# Altium PCB KNX-GW_1_3.PcbDoc
Units mm, origin at the board's own origin, x right, y up, seen from the top; angles counter-clockwise.
Board outline 29.21 x 81.99 mm, 4 copper layers (Top Layer, 3V3, GND, Bottom Layer), stack 0.778 mm thick; 65 components, 55 nets, 262 pads, 89 vias.
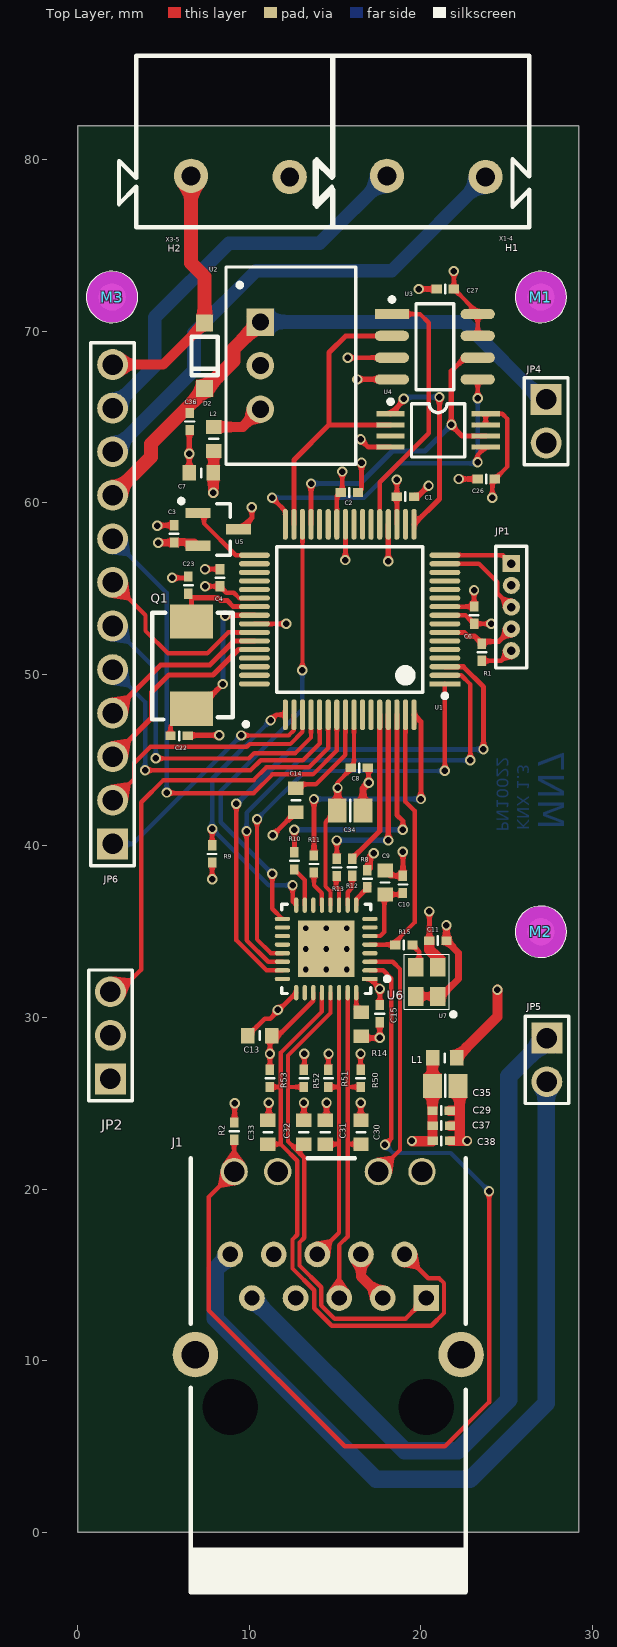
[diagram p0: Top Layer view]
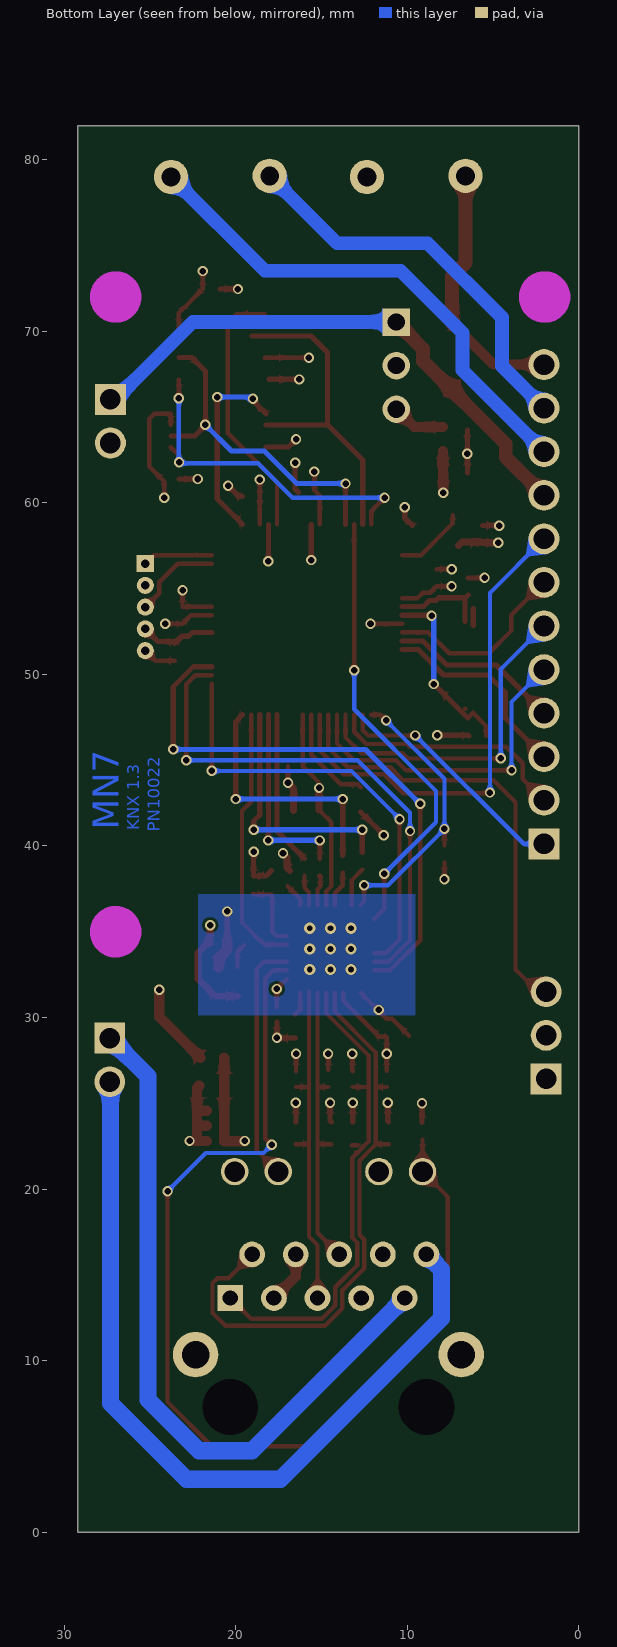
[diagram p1: Bottom Layer view, seen from below]
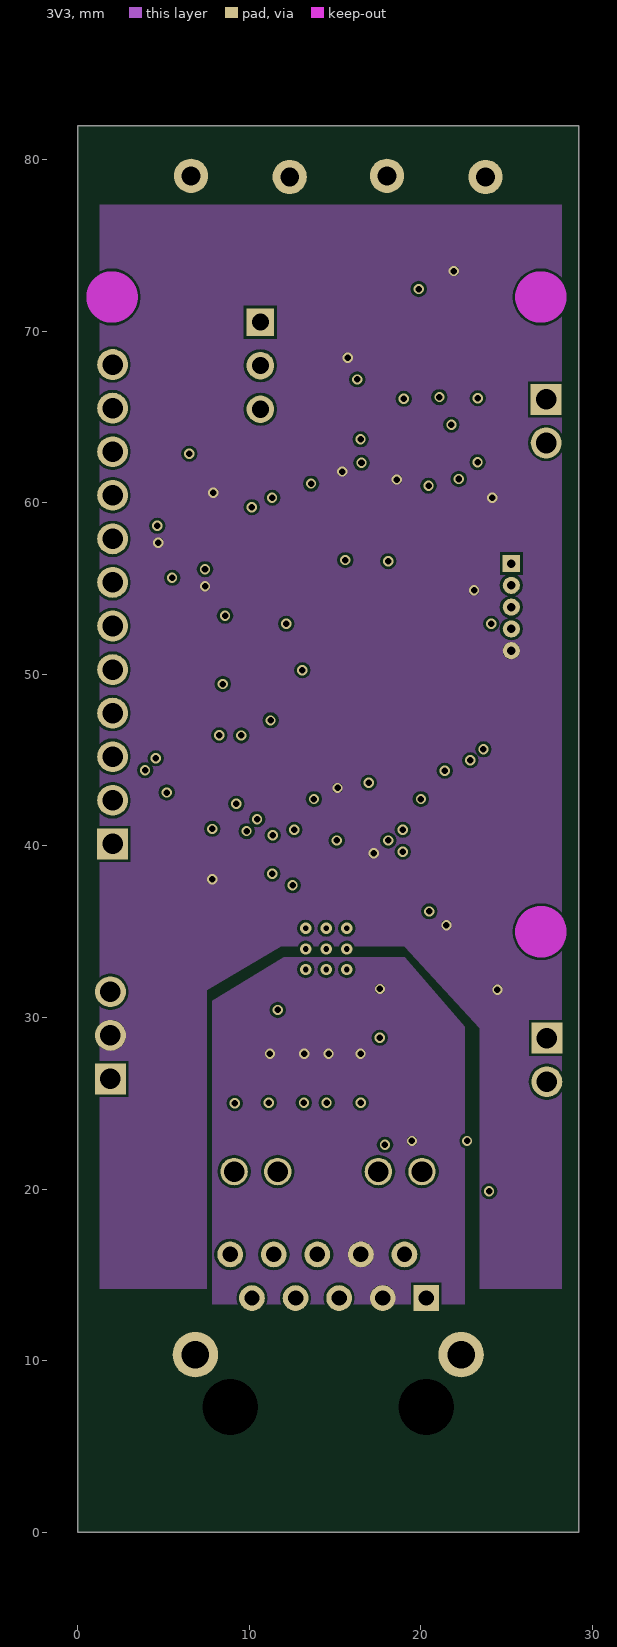
[diagram p2: 3V3]
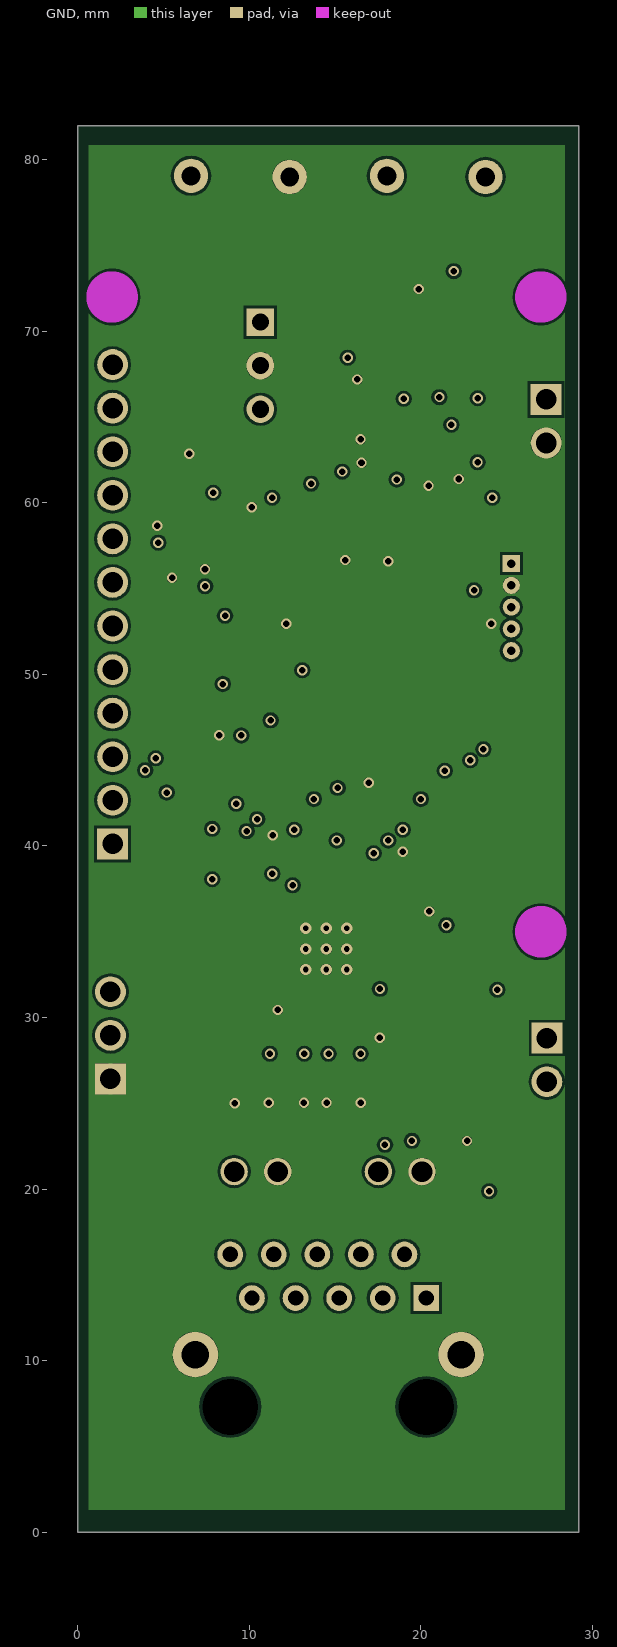
[diagram p3: GND]

## Layer stack, top to bottom
Top Solder: solder mask 0.0102, Solder Resist, Dk 3.5
Top Layer: signal copper 0.0356
Dielectric 1: core 0.254, FR-4, Dk 4.2
3V3: signal copper 0.036
Dielectric 3: prepreg 0.127, Dk 4.2
GND: signal copper 0.036
Dielectric 2: core 0.254, Dk 4.2
Bottom Layer: signal copper 0.0356
Bottom Solder: solder mask 0.0102, Solder Resist, Dk 3.5

## Board outline
0,0 0,81.991 29.21,81.991 29.21,0

## Design rules (kind name [scope] priority, off if disabled: settings)
Clearance AT90 [IsPad vs IsPad] p1: gap=0.1
Clearance [All] p2: gap=0.16
ComponentClearance Board1 [((id='Multi_HITSCHIENE_POE')  OR (id='Multi_HUTSCHIENE_EXT_1_1'))] p1: gap=0 collisioncheckmode=3 verticalgap=0 showdistances=FALSE
ComponentClearance Case [id='00010333'] p2: gap=0 collisioncheckmode=3 verticalgap=0 showdistances=FALSE
ComponentClearance ComponentClearance_1 [(HasFootprint('WAGO-243-211') AND HasFootprint('WAGO-243-211'))] p3: gap=0 collisioncheckmode=3 verticalgap=0 showdistances=FALSE
ComponentClearance [All] p4: gap=0.254 collisioncheckmode=3 verticalgap=0.254 showdistances=FALSE
DiffPairsRouting [All] p1: maxlimit=0.254 minlimit=0.12 mostfreqgap=0.16 toplayer_minwidth=0.2 toplayer_maxwidth=0.381 toplayer_prefwidth=0.381 midlayer1_minwidth=0.2 midlayer1_maxwidth=0.381 midlayer1_prefwidth=0.381 midlayer2_minwidth=0.2 midlayer2_maxwidth=0.381 midlayer2_prefwidth=0.381 bottomlayer_minwidth=0.2 bottomlayer_maxwidth=0.381 bottomlayer_prefwidth=0.381 maxuncoupledlength=12.7
HoleSize [All] p1: absolutevalues=TRUE maxlimit=4 minlimit=0.025 maxpercent=80.000 minpercent=20.000
MinimumAnnularRing [HasFootprint('32M1-A_M')] p1: minimumring=0.12
MinimumSolderMaskSliver MinimumSolderMaskSliver_2 [HasFootprint('HDR1X5-1.27')] p1: minsoldermaskwidth=0.05
MinimumSolderMaskSliver MinimumSolderMaskSliver_1 [HasFootprint('32M1-A_M')] p2: minsoldermaskwidth=0
MinimumSolderMaskSliver [All] p3: minsoldermaskwidth=0.1
PolygonConnect [All vs (InNet('GND') AND InPadClass('All Pads'))] p1: connectstyle=Relief reliefconductorwidth=0.254 reliefentries=4 polygonreliefangle="90 Angle" airgapwidth=0
RoomDefinition Ethernet [InComponentClass('Ethernet')] p1: confinementstyle=ConfineIn formatcopy=TRUE lockcomponents=FALSE outline -1.6,-9.804 48.336,-9.804 48.336,87.249 -1.6,87.249
RoomDefinition MCU [InComponentClass('MCU')] p2: confinementstyle=ConfineIn formatcopy=TRUE lockcomponents=FALSE outline -0.965,-9.601 50.838,-9.601 50.838,86.36 -0.965,86.36
RoutingVias [All] p1: holewidth=0.381 width=0.584 viastyle="Through Hole" minholewidth=0.3 minwidth=0.3 maxholewidth=0.711 maxwidth=1.27
ShortCircuit ShortCircuit_1 [U6 vs IsVia] p1: allowed=TRUE
ShortCircuit [All] p2: allowed=FALSE
SilkToBoardRegionClearance [(HasFootprint('7499210121A') AND IsEmbeddedBoard)] p1:
SilkToSilkClearance [All] p1: silktosilkclearance=0.13
SilkToSolderMaskClearance [IsPad] p1: minsilkscreentomaskgap=0.13 clearancetoexposedcopper=TRUE
SolderMaskExpansion [All] p1: expansion=0.102
Width [All] p1: maxlimit=2 minlimit=0.254 preferedwidth=0.254
22 further rules are at their usual default settings.

## Classes and differential pairs
component class Ethernet: C9 C10 C11 C13 C15 C29 C30 C31 C32 C33 C34 C35 C37 C38 J1 JP4 JP5 L1 R2 R8 R9 R10 R11 R12 R13 R14 R15 R50 R51 R52 R53 U6 U7
component class MCU: C1 C2 C3 C4 C6 C7 C8 C14 C22 C23 C26 C27 C36 D2 H1 H2 JP1 JP2 JP6 L2 M1 M2 M3 Q1 R1 U1 U2 U3 U4 U5 X1-4 X3-5
differential pair RX: +RX_P -RX_N
differential pair TX: +TX_P -TX_N

## Components (designator, comment, footprint, x,y, rotation, side; value= is the part's Value field where it differs from the comment)
C1 "100nF16V_0402" C0402 19.101,60.363 r0 top
C2 "100nF16V_0402" C0402 15.837,60.604 r0 top
C3 "100nF16V_0402" C0402 5.613,58.191 r90 top
C4 "100nF16V_0402" C0402 8.293,55.639 r90 top
C6 "100nF16V_0402" C0402 23.101,53.454 r270 top
C7 "10uF10V_0603" C0603 7.201,61.747 r180 top
C8 "100nF25V_0402" C0402 16.408,44.552 r0 top
C9 "1uF50V_0603" C0603 17.92,37.871 r90 top
C10 "470pF50V_0402" C0402 18.948,37.757 r90 top
C11 "100nF16V_0402" C0402 20.993,34.48 r180 top
C13 "22nF50V_0603" C0603 10.604,28.943 r180 top
C14 "10uF10V_0603" C0603 12.713,42.672 r270 top
C15 "100nF25V_0402" C0402 17.602,30.226 r270 top
C22 "22pF50V_0402-AVX" C0402 5.905,46.419 r0 top
C23 "22pF50V_0402-AVX" C0402 6.452,55.207 r90 top
C26 "100nF16V_0402" C0402 23.812,61.392 r180 top
C27 "100nF16V_0402" C0402 21.425,72.466 r180 top
C29 "100nF25V_0402" C0402 21.179,24.575 r0 top
C30 "10pF50V_0603" C0603 16.51,23.32 r90 top
C31 "10pF50V_0603" C0603 14.427,23.32 r90 top
C32 "10pF50V_0603" C0603 13.17,23.32 r90 top
C33 "10pF50V_0603" C0603 11.087,23.32 r90 top
C34 "4u7F25V_0805" C0805 15.875,42.075 r0 top
C35 "4u7F25V_0805" C0805 21.425,26.022 r0 top
C36 "100n50V_0402" C0402 6.528,64.745 r270 top
C37 "100nF25V_0402" C0402 21.196,23.698 r0 top
C38 "100nF25V_0402" C0402 21.196,22.809 r0 top
D2 "RB160M-30TR" SOD123 7.391,68.58 r270 top
H1 "Wago-243-211" WAGO-243-211 20.896,79 r0 top
H2 "Wago-243-211" WAGO-243-211 9.479,79 r0 top
J1 "7499210124A" 7499210124A 14.6,7.3 r180 top
JP1 "ICDI" HDR1X5-1.27 25.273,53.924 r270 top
JP2 "Header-3" HDR1X3 1.905,28.963 r90 top locked
JP4 "Header-2" HDR1X2 27.305,64.762 r270 top
JP5 "Header-2" HDR1X2 27.343,27.528 r270 top locked
JP6 "Plug_12_2.54" HDR1X12_2.54 2.032,54.094 r90 top locked
L1 "120R4A_0603" L0603 21.387,27.648 r0 top
L2 "300R2A_0603" L0603 7.925,63.729 r270 top
M1 "Paste-Mark" Mark-3mm 27,72 r0 top
M2 "Paste-Mark" Mark-3mm 27,35 r0 top
M3 "Paste-Mark" Mark-3mm 2,72 r0 top
Q1 "7A-8.000MAAJ-T" TXC_7A 6.629,50.546 r90 top locked
R1 "10k_0402" R0402 23.558,51.295 r270 top
R2 "10k_0402" R0402 9.119,23.381 r270 top
R8 "10k_0402" R0402 16.878,38.087 r90 top
R9 "1k5_0402" R0402 7.836,39.535 r270 top
R10 "10R_0402" R0402 12.624,39.129 r90 top
R11 "10R_0402" R0402 13.767,38.951 r90 top
R12 "10R_0402" R0402 15.989,38.76 r270 top
R13 "10R_0402" R0402 15.1,38.748 r90 top
R14 "12k1_0603" R0603(1608) 16.523,29.616 r90 top
R15 "33R_0402" R0402 19.012,34.227 r180 top
R50 "49R9_0402" R0402 16.485,26.45 r90 top
R51 "49R9_0402" R0402 14.605,26.45 r90 top
R52 "49R9_0402" R0402 13.183,26.45 r90 top
R53 "49R9_0402" R0402 11.201,26.45 r90 top
U1 "PIC32MX695F512H-80I/PT" TQFP-64_N1 15.85,53.2 r180 top locked
U2 "R-783.3-0.5" R-783_3-0_5 10.643,68 r270 top
U3 "25LC1024-I_SM" SOP8_N 20.815,69.101 r0 top
U4 "23LC1024-I_ST" TSSOP8 21.006,64.224 r270 top
U5 "11AA02E48T-I_TT" SOT23_M 8.191,58.458 r0 top locked
U6 "LAN8741-EN" 32M1-A_M 14.482,34 r180 top locked
U7 "SG - 211 S*E -50.000M" "SG - 211 S*E" 20.345,32.08 r90 top
X1-4 "Wago-243-131" WAGO-243-131 20.896,79 r0 top
X3-5 "Wago-243-131" WAGO-243-131 9.479,79 r0 top

## Footprints (in the part's own frame and the unit in brackets; to place one, negate y for a bottom-side part, rotate by r counter-clockwise, add the part's x,y. Pads: shape width x height; smd on the part's side, far side on the other; paste and mask are expansions set on the pad)
32M1-A_M [mm] "QFN, 32-Leads, Body 5x5mm, Pitch 0.5mm, IPC Low Density"
  rect 0.9x0.25 smd: 1(-2.55,1.75)
  oval 0.9x0.25 smd: 2(-2.55,1.25) 3(-2.55,0.75) 4(-2.55,0.25) 5(-2.55,-0.25) 6(-2.55,-0.75) 7(-2.55,-1.25) 8(-2.55,-1.75) 17(2.55,-1.75) 18(2.55,-1.25) 19(2.55,-0.75) 20(2.55,-0.25) 21(2.55,0.25) 22(2.55,0.75) 23(2.55,1.25) 24(2.55,1.75)
  oval 0.25x0.9 smd: 9(-1.75,-2.55) 10(-1.25,-2.55) 11(-0.75,-2.55) 12(-0.25,-2.55) 13(0.25,-2.55) 14(0.75,-2.55) 15(1.25,-2.55) 16(1.75,-2.55) 25(1.75,2.55) 26(1.25,2.55) 27(0.75,2.55) 28(0.25,2.55) 29(-0.25,2.55) 30(-0.75,2.55) 31(-1.25,2.55) 32(-1.75,2.55)
  rect 3.3x3.3 smd: 33(0,0)
  silkscreen extent -3.68,-2.6 2.6,2.6, body extent -2.58,-2.58 2.58,2.58, height 1
7499210124A [mm] "Connector; PCB Jack, Thru-Hole; RJ45,POE; Shielded with Lightpipes; Right Angle"
  rect 1.5x1.5 hole 0.9: 1(-5.715,-6.35)
  round 1.5 hole 0.9: 2(-4.445,-8.89) 3(-3.175,-6.35) 4(-1.905,-8.89) 5(-0.635,-6.35) 6(0.635,-8.89) 7(1.905,-6.35) 8(3.175,-8.89) 9(4.445,-6.35) 10(5.715,-8.89)
  round 1.6 hole 1.2: 11(-5.465,-13.72) 12(-2.925,-13.72) 13(2.946,-13.72) 14(5.486,-13.72)
  round 2.65 hole 1.6: MH1(-7.745,-3.05) MH2(7.745,-3.05)
  round 2.95 hole 3.25 unplated: MH3(-5.715,0) MH4(5.715,0)
  silkscreen extent -8.02,-14.5 8.02,10.8, body extent -8.27,-14.51 8.13,10.79, height 13.81
C0402 [mm] "Chip Capacitor, Body 1.0x0.5mm, IPC High Density"
  rect 0.6x0.5 smd: 1(-0.5,0) 2(0.5,0)
  silkscreen extent 0,-0.25 0,0.25, body extent -0.5,-0.25 0.5,0.25, height 0.5
C0603 [mm] "Chip Capacitor, 0603"
  rect 0.8x0.9 smd: 1(-0.7,0) 2(0.7,0)
  silkscreen extent 0,-0.25 0,0.25, body extent -0.8,-0.4 0.8,0.4, height 0.8
C0805 [mm] "Chip Capacitor, Body 2.0x1.3mm, IPC High Density"
  rect 1.1x1.4 smd: 1(-0.75,0) 2(0.75,0)
  silkscreen extent 0,-0.64 0,0.64, body extent -0.5,-0.25 0.5,0.25, height 0.5
HDR1X2 [mm] "Connector; Header; 2 Position"
  rect 1.8x1.8 hole 1.2: 1(-1.27,0)
  round 1.8 hole 1.2: 2(1.27,0)
  silkscreen extent -2.54,-1.27 2.54,1.27, body extent -2.54,-1.27 2.54,1.27, height 8.62
HDR1X3 [mm] "Connector; Header; 3 Position"
  rect 1.8x1.8 hole 1.2: 1(-2.54,0)
  round 1.8 hole 1.2: 2(0,0) 3(2.54,0)
  silkscreen extent -3.81,-1.27 3.81,1.27, body extent -3.81,-1.27 3.81,1.27, height 8.62
HDR1X5-1.27 [mm] "Connector; Header; 5 Position"
  rect 1x1 hole 0.5: 1(-2.54,0)
  round 1 hole 0.5: 2(-1.27,0) 3(0,0) 4(1.27,0) 5(2.54,0)
  silkscreen extent -3.55,-0.9 3.55,0.9, body extent -3.56,-0.89 3.56,0.89, height 7
HDR1X12_2.54 [mm] "Connector; Header; 11 Position"
  rect 1.8x1.8 hole 1.2: 1(-13.97,0)
  round 1.8 hole 1.2: 2(-11.43,0) 3(-8.89,0) 4(-6.35,0) 5(-3.81,0) 6(-1.27,0) 7(1.27,0) 8(3.81,0) 9(6.35,0) 10(8.89,0) 11(11.43,0) 12(13.97,0)
  silkscreen extent -15.24,-1.27 15.24,1.27, body extent -15.21,-1.27 15.27,1.27, height 8.62
L0603 [mm] "Chip Ferrit, 0603"
  rect 0.8x0.9 smd: 1(-0.7,0) 2(0.7,0)
  silkscreen extent 0,-0.25 0,0.25, body extent -0.8,-0.4 0.8,0.4, height 0.8
Mark-3mm [mm]
  round 1.6 smd paste-2: 0(0,0)
  Keep-Out Layer circle w2: c0,0 r0.5
  silkscreen extent -1.5,-1.5 1.5,1.5
R0402 [mm] "Chip Resistor, Body 1.0x0.5mm"
  rect 0.6x0.5 smd: 1(-0.5,0) 2(0.5,0)
  silkscreen extent 0,-0.25 0,0.25, body extent -0.5,-0.24 0.5,0.26, height 0.4
R0603(1608) [mm] "Chip Resistor, 0603"
  rect 0.8x0.9 smd: 1(-0.7,0) 2(0.7,0)
  body extent -0.8,-0.4 0.8,0.4, height 0.5
R-783_3-0_5 [mm] "Recon DC-DC"
  rect 1.6x1.6 hole 1: 1(-2.54,0)
  round 1.6 hole 1: 2(0,0) 3(2.54,0)
  silkscreen extent -5.75,-2 5.75,5.55, body extent -5.72,-2.03 5.72,5.59, height 10.2
"SG - 211 S*E" [mm]
  rect 1.1x0.9 smd: 1(-0.85,-0.65) 2(0.85,-0.65) 3(0.85,0.65) 4(-0.85,0.65)
  silkscreen extent -2.02,-1.68 1.6,1.3, body extent -1.25,-1 1.25,1, height 1.3
SOD123 [mm]
  rect 1x1 smd: 1(1.905,0) 2(-1.905,0)
  silkscreen extent -1.1,-0.76 1.14,0.76, body extent -1.4,-0.85 1.4,0.88, height 1.4
SOP8_N [mm] "SOIC, 8-Leads, Body 4.9x3.9mm, Pitch 1.27mm, IPC Medium Density"
  rect 2x0.6 smd: 1(-2.5,1.905)
  oval 2x0.6 smd: 2(-2.5,0.635) 3(-2.5,-0.635) 4(-2.5,-1.905) 5(2.5,-1.905) 6(2.5,-0.635) 7(2.5,0.635) 8(2.5,1.905)
  silkscreen extent -2.62,-2.5 1.1,2.88, body extent -3,-2.54 3,2.54, height 1.7
SOT23_M [mm] "SOT23, 3-Leads, Body 2.9x1.3mm, Pitch 0.95mm, Lead Span 2.3mm - Reverse Pinning, IPC Low Density"
  rect 1.45x0.6 smd: 1(1.175,0) 2(-1.175,-0.95) 3(-1.175,0.95)
  silkscreen extent -2.28,-1.5 0.7,1.78, body extent -1.15,-1.5 1.15,1.5, height 1.1
TQFP-64_N1 [mm] "64-Pin Thin Plastic Quad Flat Pack 0.5 mm Pitch, 1.0/0.1 mm Lead Form, IPC Medium Density"
  rect 1.8x0.3 smd: 1(-5.55,3.75)
  oval 1.8x0.3 smd: 2(-5.55,3.25) 3(-5.55,2.75) 4(-5.55,2.25) 5(-5.55,1.75) 6(-5.55,1.25) 7(-5.55,0.75) 8(-5.55,0.25) 9(-5.55,-0.25) 10(-5.55,-0.75) 11(-5.55,-1.25) 12(-5.55,-1.75) 13(-5.55,-2.25) 14(-5.55,-2.75) 15(-5.55,-3.25) 16(-5.55,-3.75) 33(5.55,-3.75) 34(5.55,-3.25) 35(5.55,-2.75) 36(5.55,-2.25) 37(5.55,-1.75) 38(5.55,-1.25) 39(5.55,-0.75) 40(5.55,-0.25) 41(5.55,0.25) 42(5.55,0.75) 43(5.55,1.25) 44(5.55,1.75) 45(5.55,2.25) 46(5.55,2.75) 47(5.55,3.25) 48(5.55,3.75)
  oval 0.3x1.8 smd: 17(-3.75,-5.55) 18(-3.25,-5.55) 19(-2.75,-5.55) 20(-2.25,-5.55) 21(-1.75,-5.55) 22(-1.25,-5.55) 23(-0.75,-5.55) 24(-0.25,-5.55) 25(0.25,-5.55) 26(0.75,-5.55) 27(1.25,-5.55) 28(1.75,-5.55) 29(2.25,-5.55) 30(2.75,-5.55) 31(3.25,-5.55) 32(3.75,-5.55) 49(3.75,5.55) 50(3.25,5.55) 51(2.75,5.55) 52(2.25,5.55) 53(1.75,5.55) 54(1.25,5.55) 55(0.75,5.55) 56(0.25,5.55) 57(-0.25,5.55) 58(-0.75,5.55) 59(-1.25,5.55) 60(-1.75,5.55) 61(-2.25,5.55) 62(-2.75,5.55) 63(-3.25,5.55) 64(-3.75,5.55)
  silkscreen extent -5.68,-4.25 4.25,4.57, body extent -5,-5 5,5, height 1.2
TSSOP8 [mm] "Shrink Small Outline, Plastic, Thin; 8 Leads; Body Width 4.4 mm; Pitch 0.65 mm"
  rect 0.3x1.65 smd: 1(-0.975,-2.775) 2(-0.325,-2.775) 3(0.325,-2.775) 4(0.975,-2.775) 5(0.975,2.775) 6(0.325,2.775) 7(-0.325,2.775) 8(-0.975,2.775)
  silkscreen extent -1.8,-2.9 1.55,1.55, body extent -1.52,-1.52 1.52,1.52, height 1
TXC_7A [mm]
  rect 2x2.5 smd: 1(-2.54,0) 2(2.54,0)
  silkscreen extent -3.57,-3.3 3.05,2.29, body extent -3.17,-2.41 3.05,2.25, height 1.3
WAGO-243-131 [mm]
  round 2 hole 1.1: 1(-2.875,0.064) 2(2.875,0)
  silkscreen extent -7.07,-2.94 5.43,7.06, body extent -3.87,-1 3.87,1.06, height 9
WAGO-243-211 [mm]
  silkscreen extent -7.07,-2.94 5.43,7.06, body extent -7.15,-3 5.45,7, height 10

## Part data
C1 C2 C3 C4 C6 C11 C14 C26 C27: "Capacitor"
C7: "AVX ,  X5R, 20%, 10V"
C8 C15 C29 C37 C38: "AVX, X5R, 10%, 25V"
C9: "C series, X5R, 10%"
C10 C22 C23: "AVX, 50V"
C13: "AVX ,  X7R, 5%, 50V"
C30 C31 C32 C33: "AVX ,  +-0.5pF, 50V"
C34 C35: "TDK  C series, X7R, 10%, 25V"
C36: "C series, X5R, 10%, 50V"
D2: "Diode Schottky,2A,40V"
J1: library part "Ethernet, POE, WE7499210124A", "Modular Jack , Right Angle RJ-45, Low Profile"
JP1 JP4 JP5: "Header, 5-Pin"
JP2: "Header-3-Pin"
JP6: "Plug, 11-Pin"
L1: "Murata, Ferrit, 120Rx2A"
L2: "WE, Ferrit, 300Rx2A"
M1 M2 M3: library part Mark
Q1: library part Crystal_8MHz, "Crystal, 7A-8.000MAAJ-T"
R1 R2 R8 R9 R10 R11 R12 R13: "Vishay CRCW series, 125mW, 1%"
R14: "Vishay, CRCW series, 100mW, 1%"
R15 R50 R51 R52 R53: "Vishay CRCW series, 63mW, 1%"
U1: "High Performance ROM-less Microcontroller with External Memory Bus, 1.5K RAM, 64-Pin TQFP, 4.2 to 5.5V Supply Range, Industrial Temperature"
U2: library part Recom-R-783_3-0_5, "Voltage Regulator"
U3: "1024 Kbit Serial SPI Bus EEPROM"
U4: "1 Mbit Serial  EEPROM"
U5: "2 kbit Serial  EEPROM"
U6: "Ethernet Phy"
U7: "Crystal"

## Via types
v1: diameter 0.6, hole 0.381, Top Layer to Bottom Layer, 80 vias
v2: diameter 0.66, hole 0.33, Top Layer to Bottom Layer, tented top, 9 vias

## Nets (pads, with @x,y where several pads share a name; then routed paths per layer and width w, separated by ;. In a path a pad name is that pad's centre, name@x,y a point inside that pad or via, vN(x,y) a via of type N, cw(c..) or ccw(c..) an arc to the next point about the centre after c; other vN are vias at no path point)
3V3: C1.1 C2.1 C3.1 C4.1 C6.1 C7.1 C8.1 C11.1 C26.1 C27.1 C34.1 JP1.5 JP2.2 L1.2 L2.2 R1.2 R8.2 R9.2 U1.10 U1.19 U1.26 U1.38 U1.57 U3.3 U3.7 U3.8 U4.7 U4.8 U5.2 U6.12 U7.1 U7.4 | length 57.6
  Top Layer w0.254: v1(7.421,55.139) C4.1 8.67,54.762 9.091,54.762 9.403,54.45 U1.38 ; v1(7.836,38.062) R9.2 ; U6.12 14.732,37.355 14.442,37.645 14.442,41.392 C34.1 ; U1.26 15.1,60.413 15.418,60.731 v1(15.418,61.824) ; v1(15.146,43.383) 15.146,43.696 16.1,44.649 U1.57 ; v1(15.735,68.466) U3.3 ; U1.19 C1.1 C1.1 v1(18.601,61.362) ; U1.10 23.097,53.95 C6.1 v1(23.101,54.902) ; v1(21.925,73.512) C27.1 23.315,71.076 U3.8 U3.7 ; R1.2 24.684,50.795 JP1.5 ; U4.7 U4.8 24.742,65.199 25.044,64.897 25.044,62.124 C26.1 24.168,61.247 v1(24.168,60.3)
  Top Layer w0.3: C34.1 C34.1@15.146,42.097
  Top Layer w0.4: v1(4.699,57.683) 5.605,57.683 C3.1 5.646,57.724 6.801,57.724 U5.2 ; C34.1@15.146,42.097 v1(15.146,43.383) ; R8.2@16.853,38.557 17.018,38.722 17.018,39.345 v1(17.247,39.573) ; U7.4@19.899,31.243 21.199,31.243 22.2,32.244 22.2,33.774 C11.1 v1(21.493,35.387)
  Top Layer w0.6: v1(7.901,60.592) C7.1 7.925,61.771 L2.2 ; L1.2@22.074,27.661 24.462,30.048 v1(24.462,31.623)
12V: C36.1 D2.1 JP4.1 JP6.9 U2.1 | length 32.2
  Top Layer w0.8: JP6.9 4.267,62.679 4.267,63.449 9.08,68.263 9.08,68.978 U2.1
  Bottom Layer w0.8: U2.1@10.643,70.549 22.504,70.549 JP4.1@27.191,65.862
24V: D2.2 JP6.12 X3-5.1 | length 15.2
  Top Layer w0.6: JP6.12 4.97,68.064 D2.2
  Top Layer w0.8: X3-5.1@6.604,78.981 6.604,73.977 7.391,73.19 D2.2
GND: C1.2 C2.2 C3.2 C4.2 C6.2 C7.2 C8.2 C9.2 C10.2 C11.2 C13.2 C14.2 C15.2 C22.2 C23.2 C26.2 C27.2 C29.2 C30.2 C31.2 C32.2 C33.2 C34.2 C35.2 C36.2 C37.2 C38.2 J1.11 J1.13 J1.MH1 J1.MH2 JP1.2 JP2.1 JP4.2 R2.1 R14.1 U1.9 U1.20 U1.25 U1.41 U2.2 U3.4 U4.4 U5.1 U6.25 U6.33 U7.2 X3-5.2 | length 53.5
  Top Layer w0.254: v1(7.417,56.139) C4.2 ; C13.2 10.895,29.934 11.216,29.934 U6.25 ; U1.41 v1(12.145,52.95) ; v1(16.954,43.688) C8.2@16.954,44.64 ; U1.9 22.605,53.45 C6.2 v1(24.105,52.954)
  Top Layer w0.3: v1(4.635,58.661) 4.666,58.691 C3.2 ; v1(5.499,55.631) C23.2@6.452,55.631 ; C22.2 6.444,46.457 v1(8.255,46.457) ; C7.2 C36.2@6.501,64.245 ; R2.1@9.144,23.881 v1(9.144,25.006) ; U5.1@9.709,58.674 10.147,59.112 v1(10.147,59.753) ; C33.2@11.087,23.916 11.138,23.967 v1@11.138,24.943 ; v1(11.367,40.626) C14.2 ; C32.2@13.17,23.916 13.183,23.929 v1@13.183,24.943 ; C31.2@14.427,23.916 14.503,23.992 v1@14.503,24.905 ; v1@15.6,56.714 U1.25 ; v1(16.294,67.196) 16.307,67.208 U3.4@18.059,67.208 ; C2.2 16.54,60.808 v1@16.54,62.362 ; v1(16.485,63.703) 16.939,63.249 U4.4 ; v1@16.497,24.93 16.497,23.929 C30.2@16.51,23.916 ; R14.1@16.535,28.802 17.563,28.802 17.602,28.842 C15.2 ; C9.2 18.234,38.257 18.961,38.257 v1@18.961,39.662 ; U1.20 18.1,56.615 v1@18.11,56.604 ; C1.2 19.812,60.363 v1(20.447,60.998) ; v1(19.875,72.466) C27.2 ; C11.2 v1(20.493,36.187) ; v1(22.212,61.392) C26.2
  Top Layer w0.4: C34.2 16.625,43.359 v1(16.954,43.688)
  Top Layer w0.6: C11.2 20.493,33.952 20.995,33.45 U7.2 ; C29.2 22.174,24.575 22.263,24.486 ; C38.2 22.263,22.809 ; C37.2 22.225,23.698 22.263,23.66 ; C35.2 22.111,26.022 22.263,25.87 22.263,24.486 ; v1(22.695,22.809) 22.263,22.809 ; 22.263,22.809 22.263,23.66 ; 22.263,23.66 22.263,24.486
  Bottom Layer w0.3: v1@14.465,24.943 v1@14.503,24.905 ; v1@16.472,24.905 v1@16.497,24.93
  other v1: 11.138,25.03 13.183,25.03 14.503,25.03 16.497,25.03 17.602,28.816 11.659,30.442 18.948,39.662 18.1,56.604 15.6,56.667 16.54,62.332 6.502,62.865
  other v2: 13.282,32.8 14.482,32.8 15.682,32.8 13.282,34 14.482,34 15.682,34 13.282,35.2 14.482,35.2 15.682,35.2
NetC9_1: C9.1 C10.1 U6.6 | length 4.2
  Top Layer w0.254: U6.6 17.632,34.75 17.869,34.987 17.869,37.019 C9.1@17.97,37.121 ; C9.1 18.952,37.171 C10.1@18.986,37.206
NetC13_1: C13.1 C15.1 C29.1 C35.1 C37.1 C38.1 J1.3 J1.4 L1.1 R50.2 R51.2 R52.2 R53.2 U6.1 U6.27 | length 19.9
  Top Layer w0.254: R53.2@11.201,26.9 11.201,27.788 v1(11.201,27.889) 11.201,28.84 C13.1@11.239,28.878 ; C13.1 C13.1@11.239,28.878 ; R52.2@13.183,26.878 R52.2@13.208,26.903 ; R52.2 13.208,26.975 v1(13.208,27.889) ; U6.27 13.732,30.979 11.632,28.878 C13.1@11.239,28.878 ; R51.2 14.605,27.876 v1(14.618,27.889) ; R50.2@16.485,26.878 v1(16.485,27.889) ; U6.1 v1(17.615,31.667) C15.1@17.615,30.586
  Top Layer w0.6: J1.4 16.505,14.92 J1.3 ; v1@19.482,22.796 20.679,22.796 20.679,26.018 C35.1 20.675,27.636 L1.1
  other v1: 19.482,22.809
NetC14_1: C14.1 U1.56 | length 6
  Top Layer w0.254: C14.1@12.713,43.41 12.902,43.599 13.881,43.599 15.6,45.318 U1.56
NetC22_1: C22.1 Q1.1 U1.40 | length 10.7
  Top Layer w0.254: C22.1 5.406,46.998 6.172,47.765 Q1.1@6.477,47.46 ; Q1.1@6.612,47.989 Q1.1
  Top Layer w0.3: Q1.1@6.477,47.46 v1(8.458,49.441) ; v1(8.585,53.429) 8.607,53.45 U1.40
  Bottom Layer w0.3: v1(8.458,49.441) 8.458,53.302 v1(8.585,53.429)
NetC23_1: C23.1 Q1.2 U1.39 | length 6.5
  Top Layer w0.3: Q1.2@6.159,52.857 Q1.2@6.159,53.84 ; C23.1@6.452,54.631 C23.1@6.612,54.47 ; Q1.2 6.629,54.453 C23.1@6.612,54.47 ; U1.39 9.067,53.95 8.712,54.305 8.331,54.305 8.166,54.47 C23.1@6.612,54.47
NetJ1_9: J1.9 JP5.1 | length 41.9
  Bottom Layer w1: J1.9 19.055,4.75 22.149,4.75 25.121,7.722 25.121,26.575 JP5.1
NetJ1_10: J1.10 JP5.2 | length 47.3
  Bottom Layer w1: J1.10 8.014,15.319 8.014,12.459 17.386,3.086 22.873,3.086 27.305,7.518 JP5.2@27.305,25.758
NetJ1_12: J1.12 U6.3 | length 14.3
  Top Layer w0.254: U6.3 18.363,33.25 18.783,32.829 18.783,22.278 J1.12
NetJ1_14: J1.14 R2.2 U6.2 | length 62
  Top Layer w0.254: R2.2@9.114,22.881 J1.14 7.633,19.539 7.633,12.929 15.557,5.004 21.399,5.004 23.978,7.582 v1(23.978,19.875) ; U6.2 17.809,32.75 18.275,32.283 18.275,22.949 v1(17.907,22.581)
  Bottom Layer w0.254: v1(17.907,22.581) 18.381,22.107 21.746,22.107 v1(23.978,19.875)
NetJP1_1: JP1.1 U1.16 | length 4.1
  Top Layer w0.254: U1.16 24.787,56.95 JP1.1
NetJP1_3: JP1.3 U1.15 | length 5.3
  Top Layer w0.254: U1.15 23.382,56.45 24.46,55.372 24.46,54.737 JP1.3
NetJP1_4: JP1.4 R1.1 U1.7 | length 4.5
  Top Layer w0.3: U1.7 22.531,52.45 22.758,52.222 23.131,52.222 R1.1 23.681,51.918 24.536,51.918 JP1.4
NetJP2_3: JP2.3 U1.54 | length 26.4
  Top Layer w0.254: JP2.3@1.905,31.003 3.696,32.794 3.696,42.545 4.991,43.84 10.249,43.84 10.996,44.587 13.472,44.587 14.6,45.715 U1.54
NetJP6_1: JP6.1 U1.50 | length 14.4
  Top Layer w0.254: v1(9.531,46.442) 12.292,46.442 12.598,46.749 U1.50@12.598,47.092 ; U1.50@12.6,46.873 U1.50
  Bottom Layer w0.254: JP6.1 3.213,40.124 v1(9.531,46.442)
NetJP6_2: JP6.2 U1.51 | length 14.2
  Top Layer w0.254: JP6.2 3.277,43.909 3.277,44.818 4.242,45.783 9.855,45.783 10.02,45.949 12.393,45.949 13.1,46.655 U1.51
NetJP6_3: JP6.3 U1.44 | length 11.7
  Top Layer w0.3: JP6.3 4.293,47.465 4.293,48.959 5.309,49.974 7.887,49.974 9.362,51.45 U1.44
NetJP6_4: JP6.4 U1.43 | length 10
  Top Layer w0.3: JP6.4 4.834,50.546 7.696,50.546 9.1,51.95 U1.43
NetJP6_5: JP6.5 U1.53 | length 19.2
  Top Layer w0.254: v1(3.924,44.412) 10.071,44.412 10.66,45.001 13.124,45.001 14.1,45.977 U1.53
  Bottom Layer w0.254: JP6.5 3.924,48.392 v1(3.924,44.412)
NetJP6_6: JP6.6 U1.52 | length 19.6
  Top Layer w0.254: v1@4.547,45.098 9.97,45.098 10.287,45.415 12.687,45.415 13.6,46.327 U1.52
  Bottom Layer w0.254: JP6.6 4.547,50.309 v1(4.547,45.11)
NetJP6_7: JP6.7 U1.42 | length 11
  Top Layer w0.254: JP6.7 3.95,53.446 3.95,52.54 5.258,51.232 7.556,51.232 8.775,52.45 U1.42
NetJP6_8: JP6.8 U1.55 | length 29.2
  Top Layer w0.254: v1@5.194,43.116 5.194,43.078 10.249,43.078 11.344,44.173 13.706,44.173 15.1,45.567 U1.55
  Bottom Layer w0.254: JP6.8 5.182,54.754 5.182,43.129 v1@5.194,43.116
  other v1: 5.182,43.116
NetJP6_10: JP6.10 X1-4.2 | length 29.7
  Bottom Layer w0.8: JP6.10 6.782,67.734 6.782,69.913 10.401,73.533 18.304,73.533 X1-4.2
NetJP6_11: JP6.11 X1-4.1 | length 23.3
  Bottom Layer w0.8: JP6.11 4.483,67.975 4.483,70.802 8.814,75.133 14.091,75.133 X1-4.1
NetL2_1: L2.1 U2.3 | length 3.1
  Top Layer w0.6: L2.1 9.611,64.429 U2.3
NetR8_1: R8.1 U6.9 | length 1.4
  Top Layer w0.254: U6.9 16.232,36.9 R8.1@16.982,37.649
NetR9_1: R9.1 U1.49 U6.16 | length 17
  Top Layer w0.254: R9.1 v1(7.836,40.996) ; v1(11.239,47.32) 11.57,47.65 U1.49 ; v1(12.522,37.706) 12.522,36.76 U6.16
  Bottom Layer w0.254: v1(11.239,47.32) 7.836,43.917 v1(7.836,40.996) 11.125,37.706 v1(12.522,37.706)
NetR10_1: R10.1 U6.15 | length 2.3
  Top Layer w0.254: R10.1 13.232,38.02 U6.15
NetR10_2: R10.2 U1.62 | length 14.5
  Top Layer w0.3: R10.2@12.611,39.641 R10.2 v1(12.624,40.945) ; U1.62 18.6,41.814 18.948,41.465 v1(18.948,40.945)
  Bottom Layer w0.3: v1(12.624,40.945) v1(18.948,40.945)
NetR11_1: R11.1 U6.13 | length 2.1
  Top Layer w0.254: R11.1 13.767,37.706 14.232,37.241 U6.13
NetR11_2: R11.2 U1.64 | length 14.6
  Top Layer w0.3: R11.2 v1(13.767,42.736) ; U1.64 20.002,47.247 v1(20.002,42.735)
  Bottom Layer w0.3: v1(13.767,42.736) v1(20.002,42.735)
NetR12_1: R12.1 U1.60 | length 9.1
  Top Layer w0.3: R12.1 17.6,40.871 U1.60
NetR12_2: R12.2 U6.10 | length 1.8
  Top Layer w0.254: U6.10 15.732,37.309 15.989,37.567 R12.2
NetR13_1: R13.1 U6.11 | length 1.8
  Top Layer w0.254: R13.1@15.062,38.21 15.062,37.643 15.232,37.473 U6.11
  Top Layer w0.3: R13.1@15.062,38.21 R13.1
NetR13_2: R13.2 U1.61 | length 11.5
  Top Layer w0.254: R13.2 v1(15.1,40.322)
  Top Layer w0.3: U1.61 v1(18.1,40.322) v1@18.125,40.337
  Bottom Layer w0.3: v1(15.1,40.322) 15.088,40.322 15.097,40.328 v1@15.113,40.337 ; v1@18.125,40.337 v1@15.113,40.337 ; v1@15.113,40.337 15.111,40.321 v1@15.113,40.337
NetR14_2: R14.2 U6.32 | length 1.4
  Top Layer w0.254: R14.2@16.232,30.505 U6.32
  Top Layer w0.3: R14.2@16.232,30.505 R14.2@16.535,30.202
NetR15_1: R15.1 U7.3 | length 1.4
  Top Layer w0.254: R15.1 19.899,33.84 U7.3@19.899,32.943
NetR15_2: R15.2 U1.63 U6.5 | length 15.5
  Top Layer w0.254: U6.5 18.347,34.25 19.634,35.537 19.634,42.05 19.1,42.584 U1.63
NetU1_1: U1.1 U6.21 | length 26
  Top Layer w0.254: v1(10.452,41.567) 10.452,34.557 11.259,33.75 U6.21 ; v1(21.4,44.386) U1.1
  Bottom Layer w0.254: v1(10.452,41.567) 13.259,44.374 v1@21.425,44.374
NetU1_2: U1.2 U6.22 | length 30.5
  Top Layer w0.254: v1(9.842,40.869) 9.842,34.506 11.098,33.25 U6.22 ; U1.2 22.355,49.95 22.885,49.42 v1(22.885,44.996)
  Bottom Layer w0.254: v1(9.842,40.869) 9.842,41.935 12.903,44.996 v1(22.885,44.996)
NetU1_3: U1.3 U6.23 | length 33.5
  Top Layer w0.254: v1(9.246,42.456) 9.246,34.506 11.001,32.75 U6.23
  Top Layer w0.3: U1.3 22.473,50.45 23.647,49.276 v1(23.647,45.631)
  Bottom Layer w0.3: v1@9.246,42.443 12.433,45.631 v1(23.647,45.631)
NetU1_17: U1.17 U4.1 | length 11.4
  Top Layer w0.3: U4.1 18.898,65.866 18.898,66.065 v1(18.999,66.065) ; U1.17 21.082,60.233 v1(21.082,66.167)
  Bottom Layer w0.3: v1(18.999,66.065) 19.101,66.167 v1(21.082,66.167)
NetU1_21: U1.21 U3.1 | length 15.3
  Top Layer w0.254: U1.21 17.6,61.199 20.46,64.059 20.46,70.498 19.952,71.006 U3.1
NetU1_29: U1.29 U3.6 U4.6 | length 19.2
  Top Layer w0.3: U1.29 v1(13.6,61.125) ; v1@21.768,64.529 22.39,63.906 23.773,63.906 U4.6 ; v1@21.768,64.554 21.768,67.678 22.555,68.466 U3.6
  Bottom Layer w0.3: v1(13.6,61.125) 16.447,61.125 18.339,63.017 20.244,63.017 v1(21.78,64.554)
NetU1_30: U1.30 U6.17 | length 26.5
  Top Layer w0.254: v1(11.341,38.379) 11.341,36.341 U6.17 ; v1(13.094,50.241) 13.1,50.235 U1.30
  Bottom Layer w0.254: v1(11.341,38.379) 8.331,41.389 8.331,43.205 13.094,47.968 v1(13.094,50.241)
NetU1_31: U1.31 U3.2 U4.2 | length 19.2
  Top Layer w0.3: U1.31 12.6,62.498 14.651,64.549 ; U4.2@18.238,64.541 U4.2 14.651,64.549 ; U3.2@19.037,69.736 U3.2 15.621,69.736 14.651,68.765 14.651,64.549
NetU1_32: U1.32 U3.5 U4.5 | length 20.6
  Top Layer w0.254: v1@11.367,60.338 v1(11.328,60.3) 12.1,59.528 U1.32 ; v1(23.304,62.37) 23.304,62.773 U4.5 ; v1(23.315,66.102) U3.5
  Bottom Layer w0.254: v1(11.328,60.3) 16.688,60.3 18.689,62.301 23.045,62.301 23.315,62.571 v1(23.315,66.102)
NetU1_33: U1.33 U5.3 | length 4.2
  Top Layer w0.254: U5.3@7.359,59.284 7.359,58.795 9.204,56.95 U1.33
RX_N: C31.1 J1.6 R51.1 U6.30 | length 17.2
  Top Layer w0.254: J1.6 15.232,17.457 15.232,22.631 ; C31.1 15.221,22.62 15.232,22.631 ; R51.1 15.185,25.95 15.232,25.997 ; U6.30@15.232,31.458 U6.30 15.232,25.997 ; 15.232,22.631 15.232,25.997
RX_P: C30.1 J1.5 R50.1 U6.31 | length 19.7
  Top Layer w0.254: J1.5@15.324,13.739 J1.5 15.235,16.734 15.732,17.231 15.732,22.631 ; U6.31@15.732,31.521 U6.31 15.732,25.946 ; R50.1 15.736,25.95 15.732,25.946 ; C30.1 15.743,22.62 15.732,22.631 ; 15.732,22.631 15.732,25.946
TX_N: C33.1 J1.2 R53.1 U6.28 | length 34.9
  Top Layer w0.254: C33.1 11.822,22.62 11.842,22.6 ; R53.1 11.821,25.95 11.842,25.971 ; U6.28 14.232,30.35 11.963,28.081 11.842,27.96 11.842,25.971 ; J1.2 20.427,14.808 21.063,14.808 21.352,14.519 21.352,12.781 20.603,12.032 14.801,12.032 13.784,13.049 13.784,14.104 12.514,15.374 12.514,17.062 12.789,17.337 12.789,21.654 11.963,22.479 11.842,22.6 ; 11.842,22.6 11.842,25.971
TX_P: C32.1 J1.1 R52.1 U6.29 | length 29
  Top Layer w0.254: C32.1@12.878,22.555 13.221,22.555 C32.1@13.233,22.543 ; R52.1 12.265,25.95 12.256,25.959 ; U6.29 14.732,30.264 12.256,27.788 12.256,25.959 ; J1.1@20.315,13.178 J1.1 19.111,12.446 14.972,12.446 14.198,13.22 14.198,14.275 12.928,15.545 12.928,16.89 13.203,17.165 13.203,21.825 12.256,22.772 12.256,25.959
pads on no net: J1.7 J1.8 J1.MH3 J1.MH4 M1.0 M2.0 M3.0 U1.4 U1.5 U1.6 U1.8 U1.11 U1.12 U1.13 U1.14 U1.18 U1.22 U1.23 U1.24 U1.27 U1.28 U1.34 U1.35 U1.36 U1.37 U1.45 U1.46 U1.47 U1.48 U1.58 U1.59 U4.3 U6.4 U6.7 U6.8 U6.14 U6.18 U6.19 U6.20 U6.24 U6.26

## Polygon pours and split planes (outlines as drawn)
GND on Bottom Layer "GND" (solid, pour order 9): 9.525,37.222 9.525,30.124 22.2,30.124 22.2,37.187
GND on GND "GND" (solid, pour order 5): 1.46,1.295 28.384,1.295 28.384,80.835 0.648,80.835 0.648,1.295
NetC13_1 on 3V3 "C13_1" (solid, pour order 2): 7.836,30.975 12.014,33.503 19.05,33.503 22.568,29.451 22.568,13.284 7.836,13.284 7.836,30.975
3V3 on 3V3 "C13_1" (solid, pour order 3): 1.283,14.186 7.506,14.186 7.506,31.598 11.849,34.15 19.05,34.138 23.444,29.388 23.444,14.186 28.207,14.186 28.207,77.381 1.194,77.381 1.283,77.381 1.283,14.186

## Other copper
Bottom Layer:
  text "MN7" at 26.835,40.957 h1.5 r270
  text "KNX 1.3" at 25.629,40.907 h0.7 r270
  text "PN10022" at 24.422,40.818 h0.7 r270

## Silkscreen, mask and mechanical layers (free items; w line width, h text height)
Bottom Solder:
  text "MN7" at 26.835,40.957 h1.5 r270
  text "KNX 1.3" at 25.616,40.907 h0.7 r270
  text "PN10022" at 24.409,40.818 h0.7 r270
Poly1:
  lines w0.05: 1.27,14.186 7.493,14.186 7.493,31.585 11.811,34.125 19.05,34.125 22.86,30.188 28.575,30.188 28.448,77.432 1.27,77.432 1.27,14.186 ; 7.836,13.322 20.155,13.322 20.155,19.291 22.568,19.291 22.568,29.451 19.012,33.515 12.027,33.515 7.836,30.975 7.836,13.322
Mechanical 13:
  lines w0.254: 19.99,50.063 20.142,50.063
Mechanical 15:
  lines w0.254: 14.122,24.359 14.123,24.359
  lines w0.305: 17.755,29.21 17.882,29.083 17.856,30.074
  lines w0.813: 27.305,65.507 27.407,65.583
Outline:
  the board outline again, w0.254

## Dimensions
0,0 to 29.21,0 on Mechanical 16
0,81.991 to 0,0 on Mechanical 16